# Altium PCB RGB_array.PcbDoc
Units mm, origin at the board's own origin, x right, y up, seen from the top; angles counter-clockwise.
Board outline 29.84 x 20.07 mm, 2 copper layers (Top Layer, Bottom Layer); 7 components, 7 nets, 24 pads, 4 vias.
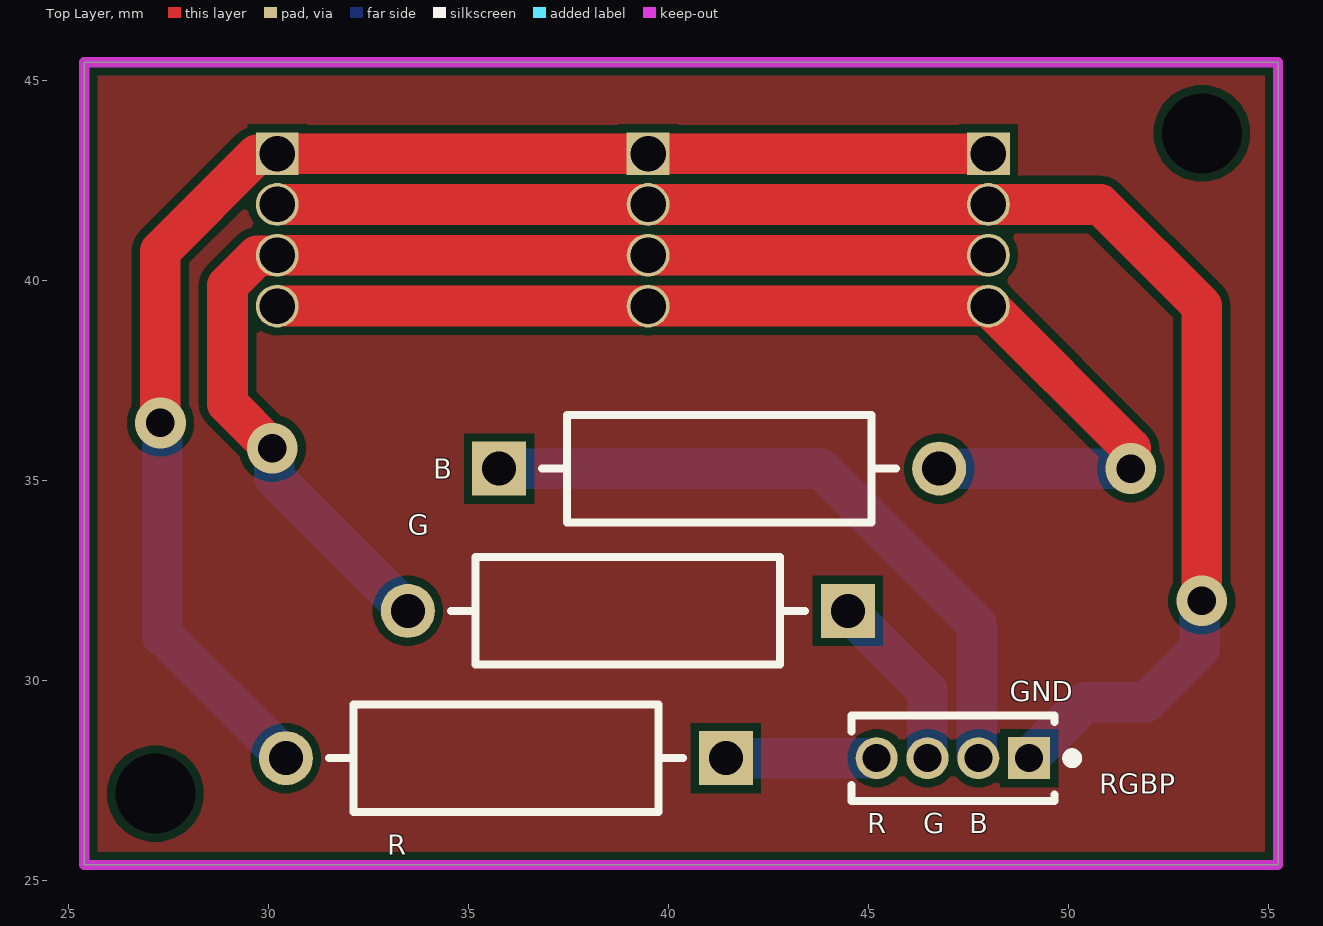
[diagram p0: Top Layer view]
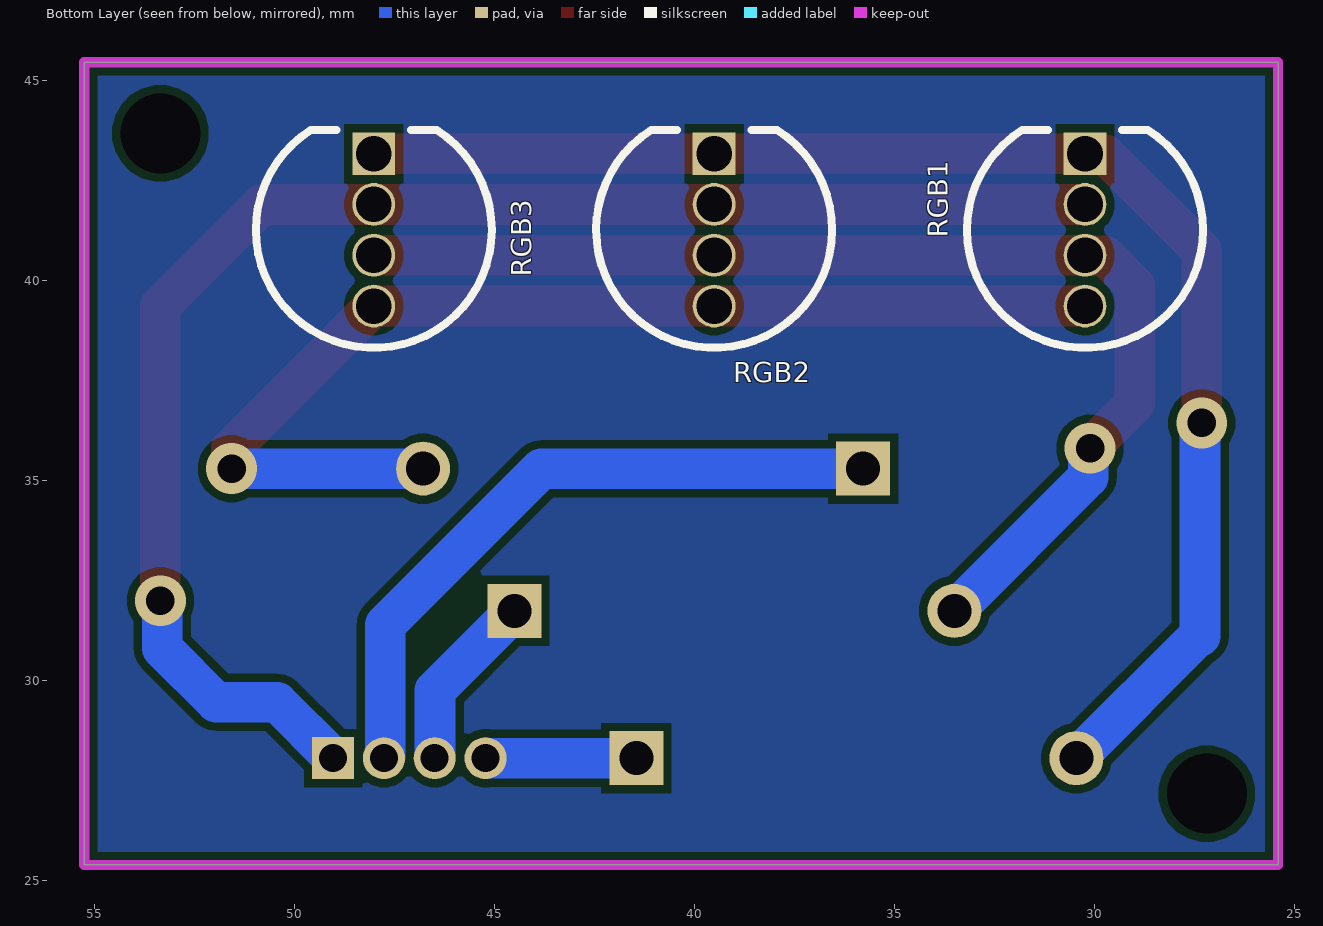
[diagram p1: Bottom Layer view, seen from below]
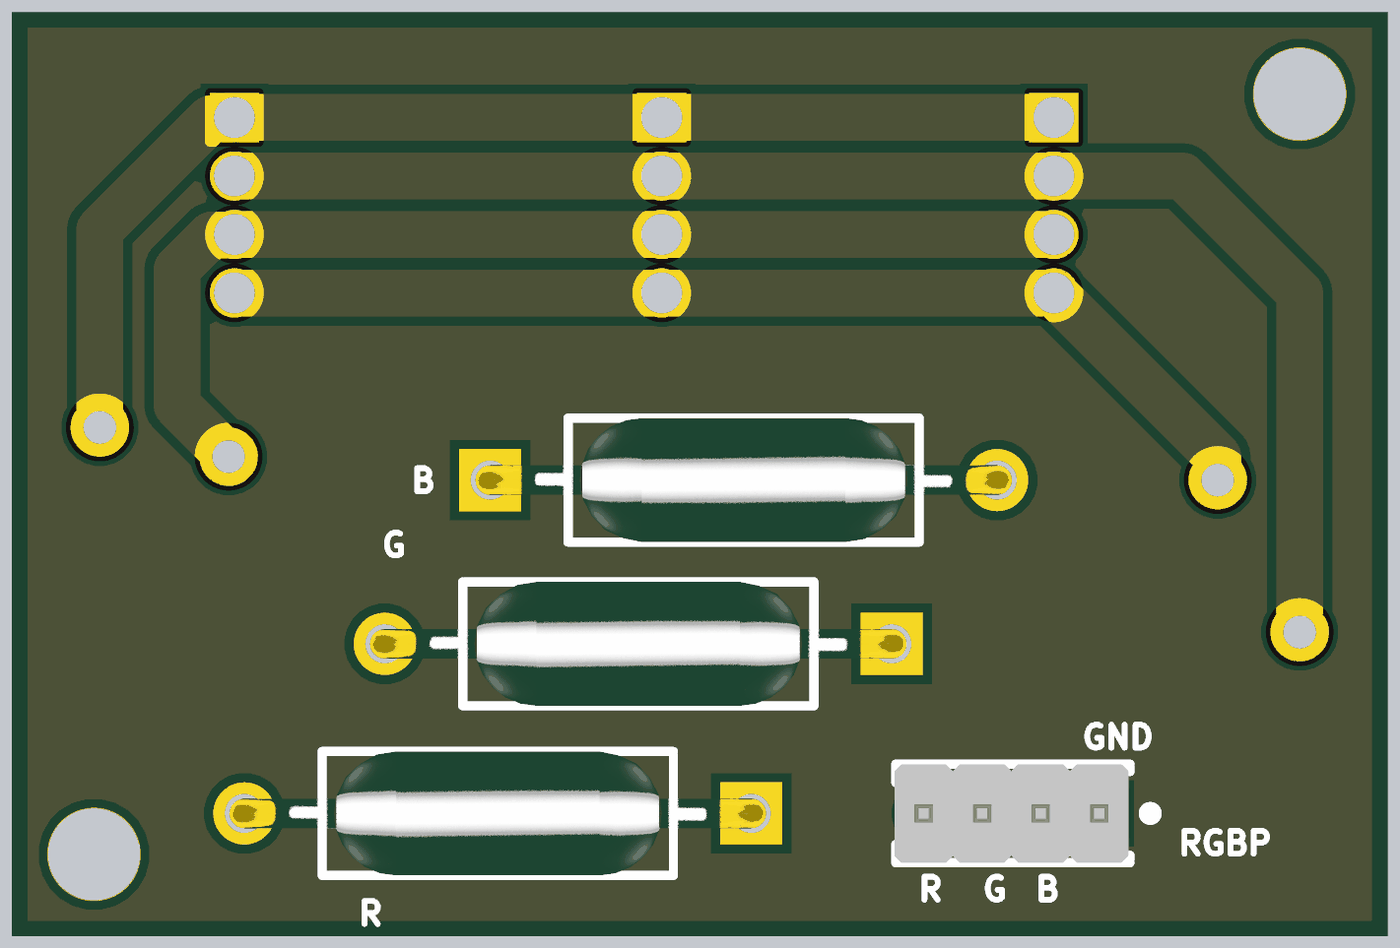
[diagram p2: 3D render of the assembled board from above, using the file's embedded part models]

## Layer stack, top to bottom
Top Solder: solder mask 0.0102, Solder Resist, Dk 3.5
Top Layer: signal copper 0.0356
Dielectric 1: dielectric 0.32, FR-4, Dk 4.8
Bottom Layer: signal copper 0.0356
Bottom Solder: solder mask 0.0102, Solder Resist, Dk 3.5

## Board outline
25.4,25.4 55.245,25.4 55.245,45.466 25.4,45.466

## Design rules (kind name [scope] priority, off if disabled: settings)
Clearance [All] p1: gap=0.2 ignorepadtopadclearanceinfootprint=FALSE
PolygonConnect [All] p1: connectstyle=Relief reliefconductorwidth=0.254 reliefentries=4 polygonreliefangle="90 Angle" airgapwidth=0.254
RoutingVias [All] p1: holewidth=0.711 width=1.27 viastyle="Through Hole" minholewidth=0.711 minwidth=1.27 maxholewidth=0.711 maxwidth=1.27
SolderMaskExpansion [All] p1: expansion=0.102 istentingtop=FALSE
Width [All] p1: maxlimit=1.016 minlimit=1.016 preferedwidth=1.016
30 further rules are at their usual default settings.

## Components (designator, comment, footprint, x,y, rotation, side; value= is the part's Value field where it differs from the comment)
B "RNC55H1002FSB14" FP-RNC55-MFG 41.275,35.306 r0 top value=100Ω
G "RNC55H1002FSB14" FP-RNC55-MFG 38.989,31.75 r180 top value=100Ω
R "RNC55H1002FSB14" FP-RNC55-MFG 35.941,28.067 r180 top value=180Ω
RGB1 "WP154A4SUREQBFZGC" KING-WP154A4SUREQBFZGC_V 30.226,41.275 r180 bottom
RGB2 "WP154A4SUREQBFZGC" KING-WP154A4SUREQBFZGC_V 39.497,41.275 r180 bottom
RGB3 "WP154A4SUREQBFZGC" KING-WP154A4SUREQBFZGC_V 48.006,41.275 r180 bottom
RGBP "GRPB041VWVN-RC" SLIN-GRPB041VWVN-RC_V 47.117,28.067 r180 top

## Footprints (in the part's own frame and the unit in brackets; to place one, negate y for a bottom-side part, rotate by r counter-clockwise, add the part's x,y. Pads: shape width x height; smd on the part's side, far side on the other; paste and mask are expansions set on the pad)
FP-RNC55-MFG [mm]
  rect 1.35x1.35 hole 0.85 paste-1000 mask+0: 1(-5.5,0)
  round 1.35 hole 0.85 paste-1000 mask+0: 2(5.5,0)
  silkscreen extent -4.43,-1.35 4.43,1.35, body extent -6.28,-1.45 6.28,1.45, height 0.25
KING-WP154A4SUREQBFZGC_V [mm] "THD, 4-Leads, Dia 5.9mm, Pitch 1.27mm"
  rect 1.07x1.07 hole 0.889 paste+0: 1(0,1.905)
  round 1.07 hole 0.889 paste+0: 2(0,0.635) 3(0,-0.635) 4(0,-1.905)
  silkscreen extent -2.95,-2.95 2.95,2.5
SLIN-GRPB041VWVN-RC_V [mm] "Header, 4-Leads, Body 5.08x2.14mm, Pitch 1.27mm"
  rect 1.05x1.05 hole 0.7: 1(-1.905,0)
  round 1.05 hole 0.7: 2(-0.635,0) 3(0.635,0) 4(1.905,0)
  silkscreen extent -3.11,-1.07 2.54,1.07, body extent -2.54,-1.07 2.54,1.07, height 4

## Part data
B G: library part CMP-02408-000004-1, "RES 10K OHM 1/8W 1% AXIAL", Manufacturer=Vishay, Package=RNC55, Power Rating=0.125W, Resistance=100Ω, Temperature="-65°C to +175°C", Temperature Coefficient=50ppm/°C, Temperature Range High=+175°C, Temperature Range Low=-65°C, Tolerance=1%, Voltage Rating=200V, Automotive=No, Category=Res, ComponentLink2Description=Datasheet, ComponentLink2URL=https://www.vishay.com/docs/31025/erc.pdf, Composition="Metal Film", Device Class L1="Passive Components", Device Class L2=Resistors, Device Class L3="Through-Hole Resistors", Digikey Description="RES 10K OHM 1/8W 1% AXIAL", Failure Rate=0.001%, Height=2.69mm, Ipc Land Pattern Name=RESAD1100W85L762D269, Lead Free=No, Manufacturer Part Number=RNC55H1002FSB14, Military Standard=true, Octopart=https://octopart.com/rnc55h1002fs-vishay-40848808, RoHS=FALSE, Series=RNC
R: library part CMP-02408-000004-1, "RES 10K OHM 1/8W 1% AXIAL", Manufacturer=Vishay, Package=RNC55, Power Rating=0.125W, Resistance=180Ω, Temperature="-65°C to +175°C", Temperature Coefficient=50ppm/°C, Temperature Range High=+175°C, Temperature Range Low=-65°C, Tolerance=1%, Voltage Rating=200V, Automotive=No, Category=Res, ComponentLink2Description=Datasheet, ComponentLink2URL=https://www.vishay.com/docs/31025/erc.pdf, Composition="Metal Film", Device Class L1="Passive Components", Device Class L2=Resistors, Device Class L3="Through-Hole Resistors", Digikey Description="RES 10K OHM 1/8W 1% AXIAL", Failure Rate=0.001%, Height=2.69mm, Ipc Land Pattern Name=RESAD1100W85L762D269, Lead Free=No, Manufacturer Part Number=RNC55H1002FSB14, Military Standard=true, Octopart=https://octopart.com/rnc55h1002fs-vishay-40848808, RoHS=FALSE, Series=RNC
RGB1 RGB2 RGB3: library part CMP-2000-07415-1, "Full Color LED Lamp, Dominant Wavelength RGB 630 / 525 / 465 nm, -40 to 85 degC, 4-Pin THD, RoHS", Color=Red,Green,Blue(RGB), Current - Test=20mA, Manufacturer=Kingbright, Millicandela Rating=1300mcdRed,1700mcdGreen,900mcdBlue, Package / Case=Radial-4Leads, Package Description="4-Pin Through Hole LED, Dia 5.9 mm, Pitch 1.27 mm", Standard Package=500, Voltage - Forward (Vf) (Typ)=1.9VRed,3.3VGreen,3.3VBlue, 3D Model="WP154A4SUREQBFZGW.sldprt /  / WP154A4SUREQBFZGW.pro /  / WP154A4SUREQBFZGW.igs /  / WP154A4SUREQBFZGW.stp", Category=Optoelectronics, Datasheet URL=https://www.kingbrightusa.com/images/catalog/spec/WP154A4SUREQBFZGC.pdf, Datasheet Version="Rev. 5A, 08/2014", Family=LEDIndication-Discrete, Height=8.60mm, Lens Style/Size=RoundwithDomedTop,5mm,T-13/4, Lens Type=Clear, Manufacturer URL=http://www.kingbright.com/, Mounting Technology=ThroughHole, Mounting Type=ThroughHole, Online Catalog=5mm,T-13/4(RGB)RoundwithDomedTopLEDLamp, Other Names="754-1615 / WP154A4SUREQBFZGC-ND", Package Reference=WP154A4SUREQBFZGC, Packaging=Bulk, Viewing Angle=50°, Wavelength - Dominant=630nm,525nm,465nm, Wavelength - Peak=645nm,515nm,460nm
RGBP: library part CMP-2000-06373-1, "Male Header, Pitch 1.27 mm, 1 x 4 Position, Height 4 mm, Tail Length 2.3 mm, -40 to 105 degC, RoHS, Bulk", Manufacturer=Sullins, Package Description="Male Header, Pitch 1.27 mm, 1 x 4 Position, Height 4 mm, Tail Length 2.3 mm", Standard Package=1, Catalog Drawings=S9014ESeriesTop, Category=Connectors,Interconnects, Connector Type=Header,Unshrouded, Contact Finish=Gold, Contact Finish Thickness=Flash, Contact Mating Length="0.118\"(3.00mm)", Contact Type=MalePin, Datasheet URL=http://www.sullinscorp.com/drawings/71_GRPB___1VWVN-RC,_10957-C.pdf, Datasheet Version="Rev. C, 12/2008", Dynamic Catalog=GRPB, Family=RectangularConnectors-Headers,MalePins, Manufacturer URL=http://www.sullinscorp.com/, Mating Products="S9010E-04-ND / -CONNHEADER.050\"4POSR/APCB / S9008E-04-ND / -CONNHEADER.050\"4POSPCBGOLD / S9005E-04-ND / -CONNHEADER.050\"4POSSMDGOLD", Mounting Technology=ThroughHole, Mounting Type=ThroughHole, Number of Positions=4, Number of Positions Loaded=All, Number of Rows=1, Other Names=S9014E-04, Package Reference=GRPB041VWVN-RC, Packaging=Bulk, Pitch="0.050\"(1.27mm)", Termination=Solder

## Free pads (board coordinates)
  round 1.524 hole 2: 5(27.178,27.178) 6(53.34,43.688)

## Via types
v1: diameter 1.27, hole 0.711, Top Layer to Bottom Layer, 4 vias

## Nets (pads, with @x,y where several pads share a name; then routed paths per layer and width w, separated by ;. In a path a pad name is that pad's centre, name@x,y a point inside that pad or via, vN(x,y) a via of type N, cw(c..) or ccw(c..) an arc to the next point about the centre after c; other vN are vias at no path point)
GND: RGB1.2 RGB2.2 RGB3.2 RGBP.1 | length 38.2
  Top Layer w1.016: RGB1.2 RGB2.2 RGB3.2 50.8,41.91 53.34,39.37 v1(53.34,32.004)
  Bottom Layer w1.016: RGBP.1 50.419,29.464 51.943,29.464 53.291,30.812 53.291,31.955 v1(53.34,32.004)
NetB_1: B.1 RGBP.2 | length 16.9
  Bottom Layer w1.016: B.1 43.815,35.306 47.715,31.406 47.715,28.113 47.752,28.076 RGBP.2
NetB_2: B.2 RGB1.4 RGB2.4 RGB3.4 | length 28.1
  Top Layer w1.016: RGB1.4 RGB2.4 RGB3.4 51.562,35.814 v1(51.562,35.306)
  Bottom Layer w1.016: B.2 v1(51.562,35.306)
NetG_1: G.1 RGBP.3 | length 4.5
  Bottom Layer w1.016: G.1 46.475,29.764 46.475,28.074 RGBP.3
NetG_2: G.2 RGB1.3 RGB2.3 RGB3.3 | length 29.3
  Top Layer w1.016: v1(30.099,35.814) 28.983,36.93 28.983,39.885 29.728,40.63 30.216,40.63 RGB1.3 RGB2.3 RGB3.3
  Bottom Layer w1.016: v1(30.099,35.814) 30.148,35.765 30.148,35.091 G.2
NetR_1: R.1 RGBP.4 | length 3.8
  Bottom Layer w1.016: R.1 RGBP.4
NetR_2: R.2 RGB1.1 RGB2.1 RGB3.1 | length 35.7
  Top Layer w1.016: v1(27.305,36.449) 27.305,40.747 29.711,43.153 30.199,43.153 RGB1.1 RGB2.1 RGB3.1
  Bottom Layer w1.016: v1(27.305,36.449) 27.349,36.405 27.349,31.115 27.393,31.115 R.2

## Polygon pours and split planes (outlines as drawn)
no net on Bottom Layer "NONET_L02_P000" (solid, pour order 0): 25.527,45.339 55.118,45.339 55.118,25.527 25.527,25.527
no net on Top Layer "NONET_L01_P001" (solid, pour order 1): 25.527,25.527 25.527,45.339 55.118,45.339 55.118,25.527

## Keep-outs
Keep-Out Layer:
  the board outline again, w0.254

## Silkscreen, mask and mechanical layers (free items; w line width, h text height)
Top Overlay:
  text "GND" at 48.537,29.487 h0.5
  text "R" at 44.981,26.185 h0.5
  text "G" at 46.378,26.185 h0.5
  text "B" at 47.521,26.185 h0.5